# Altium PCB Wiper.PcbDoc
Units mm, origin at the board's own origin, x right, y up, seen from the top; angles counter-clockwise.
Board outline 55 x 25 mm, 2 copper layers (Top Layer, Bottom Layer); 2 components, 182 nets, 57 pads, 0 vias.
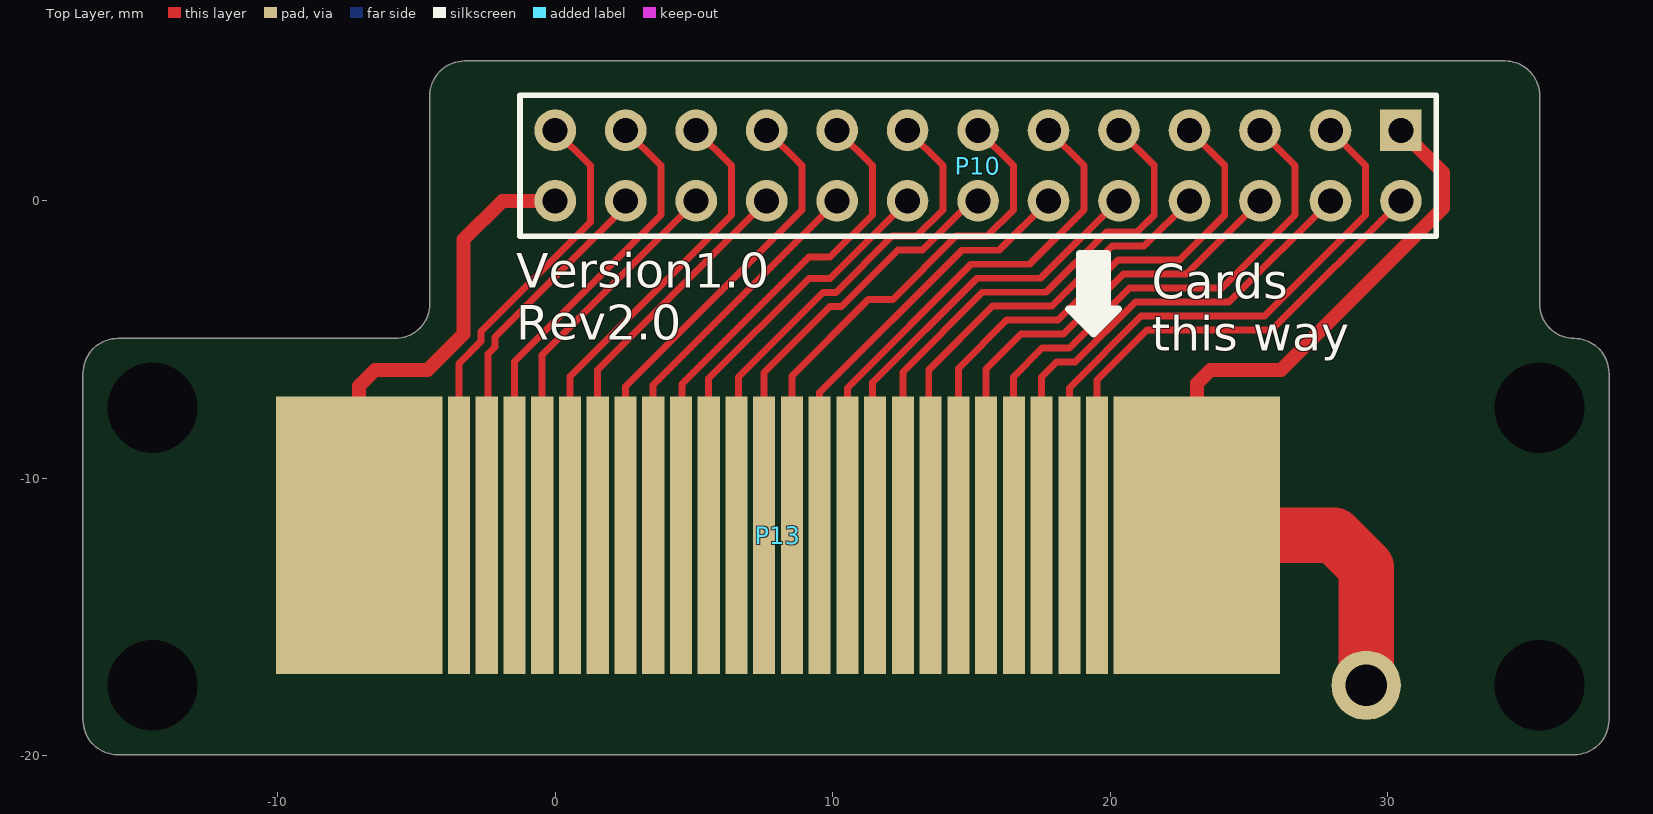
[diagram p0: Top Layer view]
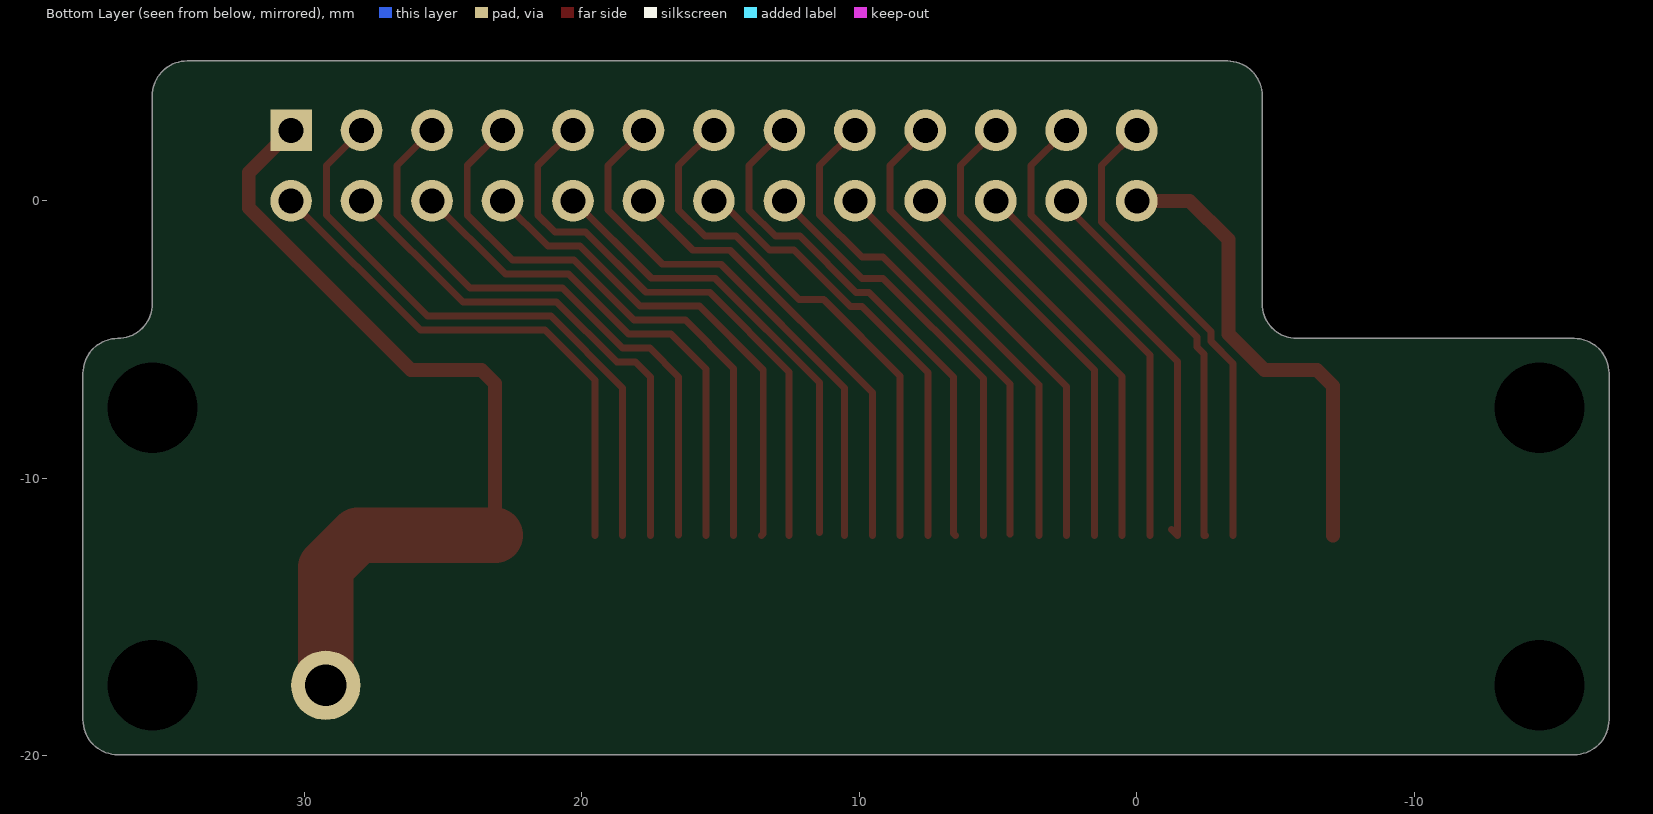
[diagram p1: Bottom Layer view, seen from below]

## Layer stack, top to bottom
Top Solder: solder mask 0.0102, Solder Resist, Dk 3.5
Top Layer: signal copper 0.0356
Dielectric 1: dielectric 0.32, FR-4, Dk 4.8
Bottom Layer: signal copper 0.0356
Bottom Solder: solder mask 0.0102, Solder Resist, Dk 3.5

## Board outline
-15.77,-19.96 cw(c-15.77,-18.71) -17.02,-18.71 -17.02,-6.21 cw(c-15.77,-6.21) -15.77,-4.96 -5.77,-4.96 ccw(c-5.77,-3.71) -4.52,-3.71 -4.52,3.79 cw(c-3.27,3.79) -3.27,5.04 34.23,5.04 cw(c34.23,3.79) 35.48,3.79 35.48,-3.71 ccw(c36.73,-3.71) 36.73,-4.96 cw(c36.73,-6.21) 37.98,-6.21 37.98,-18.71 cw(c36.73,-18.71) 36.73,-19.96

## Design rules (kind name [scope] priority, off if disabled: settings)
Clearance [All] p1: gap=0.254
PolygonConnect [All] p1: connectstyle=Relief reliefconductorwidth=0.254 reliefentries=4 polygonreliefangle="90 Angle" airgapwidth=0.254
RoutingVias [All] p1: holewidth=0.711 width=1.27 viastyle="Through Hole" minholewidth=0.711 minwidth=1.27 maxholewidth=0.711 maxwidth=1.27
SolderMaskExpansion [All] p1: expansion=0.102
Width [All] p1: maxlimit=55 minlimit=0.01 preferedwidth=0.5
30 further rules are at their usual default settings.

## Classes and differential pairs
component class ControlBrickOld: SW1
component class ControlBrickNew: Q1

## Components (designator, comment, footprint, x,y, rotation, side; value= is the part's Value field where it differs from the comment)
P10 "ResCard" HDR2X13 30.48,2.54 r180 top
P13 "Field" "Wiper Field" 26.23,-6.96 r180 top

## Footprints (in the part's own frame and the unit in brackets; to place one, negate y for a bottom-side part, rotate by r counter-clockwise, add the part's x,y. Pads: shape width x height; smd on the part's side, far side on the other; paste and mask are expansions set on the pad)
HDR2X13 [mm] "Connector; Header; 13x2 Position"
  rect 1.5x1.5 hole 0.9: 1(0,0)
  round 1.5 hole 0.9: 2(0,2.54) 3(2.54,0) 4(2.54,2.54) 5(5.08,0) 6(5.08,2.54) 7(7.62,0) 8(7.62,2.54) 9(10.16,0) 10(10.16,2.54) 11(12.7,0) 12(12.7,2.54) 13(15.24,0) 14(15.24,2.54) 15(17.78,0) 16(17.78,2.54) 17(20.32,0) 18(20.32,2.54) 19(22.86,0) 20(22.86,2.54) 21(25.4,0) 22(25.4,2.54) 23(27.94,0) 24(27.94,2.54) 25(30.48,0) 26(30.48,2.54)
  silkscreen extent -1.27,-1.27 31.75,3.81
"Wiper Field" [mm] "Wiper Area"
  rect 6x10 smd: 1(33.3,5.1) 26(3.1,5.1)
  rect 0.8x10 smd: 2(29.7,5.1) 3(28.7,5.1) 4(27.7,5.1) 5(26.7,5.1) 6(25.7,5.1) 7(24.7,5.1) 8(23.7,5.1) 9(22.7,5.1) 10(21.7,5.1) 11(20.7,5.1) 12(19.7,5.1) 13(18.7,5.1) 14(17.7,5.1) 15(16.7,5.1) 16(15.7,5.1) 17(14.7,5.1) 18(13.7,5.1) 19(12.7,5.1) 20(11.7,5.1) 21(10.7,5.1) 22(9.7,5.1) 23(8.7,5.1) 24(7.7,5.1) 25(6.7,5.1)

## Part data
P10 P13: library part "Header 13X2", "Header, 13-Pin, Dual row"

## Free pads (board coordinates)
  round 0 hole 3.25 unplated: 3(-14.52,-17.46) 4(35.48,-17.46) 5(35.48,-7.46) 6(-14.52,-7.46)
  round 2.5 hole 1.5: 16(29.23,-17.46)

## Nets (pads, with @x,y where several pads share a name; then routed paths per layer and width w, separated by ;. In a path a pad name is that pad's centre, name@x,y a point inside that pad or via, vN(x,y) a via of type N, cw(c..) or ccw(c..) an arc to the next point about the centre after c; other vN are vias at no path point)
+5V: 
GND: 
NetD1_1: 
NetD1_2: 
NetD2_1: 
NetD2_2: 
NetD3_1: 
NetD5_2: 
NetD7_2: 
NetD8_1: 
NetD9_1: 
NetD9_2: 
NetD11_1: 
NetD12_1: 
NetD13_1: 
NetD13_2: 
NetD14_1: 
NetD14_2: 
NetD15_1: 
NetD16_1: 
NetD17_1: 
NetD17_2: 
NetD18_1: 
NetD18_2: 
NetD20_1: 
NetD20_2: 
NetD21_2: 
NetD22_1: 
NetD23_1: 
NetD25_1: 
NetD25_2: 
NetD27_1: 
NetD27_2: 
NetD28_1: 
NetD28_2: 
NetD29_1: 
NetD30_1: 
NetD31_2: 
NetD32_1: 
NetD32_2: 
NetD34_1: 
NetD35_1: 
NetD36_2: 
NetD37_2: 
NetD38_1: 
NetD38_2: 
NetD40_2: 
NetD41_1: 
NetD41_2: 
NetD42_1: 
NetD42_2: 
NetD43_1: 
NetD44_1: 
NetD45_2: 
NetD46_1: 
NetD47_1: 
NetD48_1: 
NetD49_1: 
NetD50_1: 
NetDP1_1: 
NetDP1_2: 
NetDP1_3: 
NetDP1_4: 
NetDP1_5: 
NetDP1_7: 
NetDP1_8: 
NetDP1_9: 
NetDP1_10: 
NetDP1_11: 
NetDP1_12: 
NetP1_3: 
NetP2_2: 
NetP2_3: 
NetP2_4: 
NetP2_6: 
NetP3_1: 
NetP4_3: 
NetP5_2: 
NetP5_3: 
NetP5_4: 
NetP5_6: 
NetP6_1: 
NetP7_2: 
NetP7_3: 
NetP8_1: 
NetP8_3: 
NetP8_4: 
NetP8_6: 
NetP9_1: 
NetP10_1: P10.1 P13.26 pad.16 | length 31.2
  Top Layer w0.5: P13.26 23.13,-6.588 23.622,-6.096 26.162,-6.096 32.004,-0.254 32.004,1.016 P10.1
  Top Layer w2: P13.26 28.08,-12.06 29.23,-13.21 pad.16
NetP10_2: P10.2 P13.25 | length 19.2
  Top Layer w0.25: P13.25 19.53,-6.451 21.324,-4.657 25.823,-4.657 P10.2
NetP10_3: P10.3 P13.24 | length 22.2
  Top Layer w0.25: P13.24 18.53,-6.738 21.115,-4.153 25.565,-4.153 29.21,-0.508 29.21,1.27 P10.3
NetP10_4: P10.4 P13.23 | length 18.8
  Top Layer w0.25: P13.23 17.53,-6.346 18.062,-5.814 18.741,-5.814 20.906,-3.649 24.291,-3.649 P10.4
NetP10_5: P10.5 P13.22 | length 21.8
  Top Layer w0.25: P13.22@16.51,-12.04 16.51,-6.35 17.55,-5.31 18.533,-5.31 20.698,-3.145 24.033,-3.145 26.67,-0.508 26.67,1.27 P10.5
NetP10_6: P10.6 P13.21 | length 18.4
  Top Layer w0.25: P13.21 15.53,-6.06 16.784,-4.806 18.324,-4.806 20.489,-2.641 22.759,-2.641 P10.6
NetP10_7: P10.7 P13.20 | length 21.5
  Top Layer w0.25: P13.20 14.53,-6.044 16.272,-4.302 18.115,-4.302 20.28,-2.137 22.501,-2.137 24.13,-0.508 24.13,1.27 P10.7
NetP10_8: P10.8 P13.19 | length 17.9
  Top Layer w0.25: P13.19 13.462,-11.992 13.462,-6.096 15.76,-3.798 17.906,-3.798 20.071,-1.633 21.227,-1.633 P10.8
NetP10_9: P10.9 P13.18 | length 20.9
  Top Layer w0.25: P13.18 12.53,-6.168 15.404,-3.294 17.698,-3.294 19.863,-1.129 20.969,-1.129 21.59,-0.508 21.59,1.27 P10.9
NetP10_10: P10.10 P13.17 | length 17
  Top Layer w0.25: P13.17@11.43,-11.96 11.43,-6.555 15.195,-2.79 17.489,-2.79 20.279,0 P10.10
NetP10_11: P10.11 P13.16 | length 19.9
  Top Layer w0.25: P13.16 10.53,-6.742 14.986,-2.286 17.091,-2.286 19.05,-0.327 19.05,1.27 P10.11
NetP10_12: P10.12 P13.15 | length 16.3
  Top Layer w0.25: P13.15 9.53,-6.905 14.653,-1.782 15.998,-1.782 P10.12
NetP10_13: P10.13 P13.14 | length 19.6
  Top Layer w0.25: P13.14 8.53,-6.308 11.282,-3.556 12.166,-3.556 14.452,-1.27 15.567,-1.27 16.51,-0.327 16.51,1.27 P10.13
NetP10_14: P10.14 P13.13 | length 16.5
  Top Layer w0.25: P13.13 7.53,-6.186 9.906,-3.81 10.209,-3.81 10.217,-3.802 10.324,-3.802 12.352,-1.774 13.235,-1.774 15.24,0.231 P10.14
NetP10_15: P10.15 P13.12 | length 19
  Top Layer w0.25: P13.12 6.604,-11.986 6.604,-6.35 9.648,-3.306 10,-3.306 10.008,-3.298 10.115,-3.298 12.143,-1.27 13.027,-1.27 13.97,-0.327 13.97,1.27 P10.15
NetP10_16: P10.16 P13.11 | length 15.5
  Top Layer w0.25: P13.11 5.53,-6.408 9.144,-2.794 9.906,-2.794 P10.16
NetP10_17: P10.17 P13.10 | length 18.4
  Top Layer w0.25: P13.10@4.572,-12.018 4.572,-6.604 9.144,-2.032 9.906,-2.032 11.43,-0.508 11.43,1.27 P10.17
NetP10_18: P10.18 P13.9 | length 14.8
  Top Layer w0.25: P13.9 3.53,-6.63 P10.18
NetP10_19: P10.19 P13.8 | length 17.8
  Top Layer w0.25: P13.8 2.53,-6.687 8.89,-0.327 8.89,1.27 P10.19
NetP10_20: P10.20 P13.7 | length 14.6
  Top Layer w0.25: P13.7 1.53,-6.09 P10.20
NetP10_21: P10.21 P13.6 | length 17.5
  Top Layer w0.25: P13.6 0.53,-6.328 6.35,-0.508 6.35,1.27 P10.21
NetP10_22: P10.22 P13.5 | length 14.4
  Top Layer w0.25: P13.5 -0.47,-5.55 P10.22
NetP10_23: P10.23 P13.4 | length 17.6
  Top Layer w0.25: P13.4@-1.249,-11.839 P13.4 -1.47,-5.788 3.81,-0.508 3.81,1.27 P10.23
NetP10_24: P10.24 P13.3 | length 14.2
  Top Layer w0.25: P13.3 -2.423,-12.06 -2.423,-5.525 -2.167,-5.269 -2.167,-4.912 2.54,-0.205 P10.24
NetP10_25: P10.25 P13.2 | length 17.1
  Top Layer w0.25: P13.2 -3.47,-5.86 -2.671,-5.061 -2.671,-4.703 1.27,-0.762 1.27,1.27 P10.25
NetP10_26: P10.26 P13.1 | length 17.2
  Top Layer w0.5: P13.1 -7.07,-6.67 -6.5,-6.1 -4.6,-6.1 -3.3,-4.8 -3.3,-1.4 -1.9,0 P10.26
NetP11_1: 
NetP12_1: 
NetP12_2: 
NetP12_4: 
NetP12_6: 
NetP14_2: 
NetP14_3: 
NetP14_4: 
NetP14_5: 
NetP14_6: 
NetP14_7: 
NetP14_8: 
NetP14_9: 
NetP14_10: 
NetP14_11: 
NetP14_12: 
NetP14_13: 
NetP14_14: 
NetP14_15: 
NetP14_16: 
NetP14_17: 
NetP14_18: 
NetP14_19: 
NetP14_20: 
NetP14_21: 
NetP14_22: 
NetP14_23: 
NetP14_24: 
NetP14_25: 
NetP14_26: 
NetP17_2: 
NetP17_3: 
NetP17_4: 
NetP18_2: 
NetP19_2: 
NetP20_1: 
NetP20_3: 
NetP20_4: 
NetP20_5: 
NetP21_2: 
NetQ1_2: 
NetQ3_1: 
NetQ5_1: 
NetQ7_1: 
NetQ8_2: 
NetQ9_2: 
NetQ10_2: 
NetQ12_1: 
NetR2_2: 
NetR5_1: 
NetR8_1: 
NetR12_2: 
NetR13_1: 
NetR18_2: 
NetR19_1: 
NetR23_2: 
NetR48_1: 
NetR49_1: 
NetR51_1: 
NetR55_2: 
NetR55_3: 
NetR55_4: 
NetR55_5: 
NetR55_6: 
NetR55_7: 
NetR55_8: 
V+: 

## Silkscreen, mask and mechanical layers (free items; w line width, h text height)
Top Overlay:
  lines w0.25: 19.15,-3.85 19.15,-1.9 ; 19.6,-3.8 19.6,-1.9 ; 19.8,-3.9 19.8,-2 ; 18.9,-1.9 19.9,-1.9 19.9,-4.2 19.6,-4.5 19.2,-4.5 19,-4.3 19.8,-4.3 20,-4.1 19,-4.1 18.9,-4 18.9,-1.9 ; 18.9,-1.9 19.4,-1.9 19.4,-4.8 ; 19.4,-4.8 19.4,-4.8 ; 19.4,-4.8 18.5,-3.9 18.7,-3.9 20.3,-3.9 19.4,-4.8
  text "Version1.0 / Rev2.0" at -1.4,-5 h1.25
  text "Cards  / this way" at 21.5,-5.4 h1.25
Top Solder:
  rectangle: -10.2,-17.2 26.3,-6.9
Mechanical 1:
  lines w0.2: 10.48,-19.96 20.48,-19.96 ; -17.02,-18.71 ccw(c-15.77,-18.71) -15.77,-19.96 36.73,-19.96 ccw(c36.73,-18.71) 37.98,-18.71 37.98,-6.21 ccw(c36.73,-6.21) 36.73,-4.96 cw(c36.73,-3.71) 35.48,-3.71 35.48,3.79 ccw(c34.23,3.79) 34.23,5.04 -3.27,5.04 ccw(c-3.27,3.79) -4.52,3.79 -4.52,-3.71 cw(c-5.77,-3.71) -5.77,-4.96 -15.77,-4.96 ccw(c-15.77,-6.21) -17.02,-6.21 -17.02,-18.71 ; -10.5,-17.5 -10.5,-6.5 26.5,-6.5 26.5,-17.5 -10.5,-17.5
  text "Area to be gold plated" at -10.5,-18.9 h1.25